# Altium PCB ECG_BLE.PcbDoc (part 3 of 3)
Units mm, origin at the board's own origin, x right, y up, seen from the top; angles counter-clockwise.
Board outline 50.01 x 55.29 mm, 4 copper layers (Top Layer, Internal Plane-GND, Internal Plane-PWR, Bottom Layer), stack 0.99 mm thick; 109 components, 65 nets, 326 pads, 171 vias.
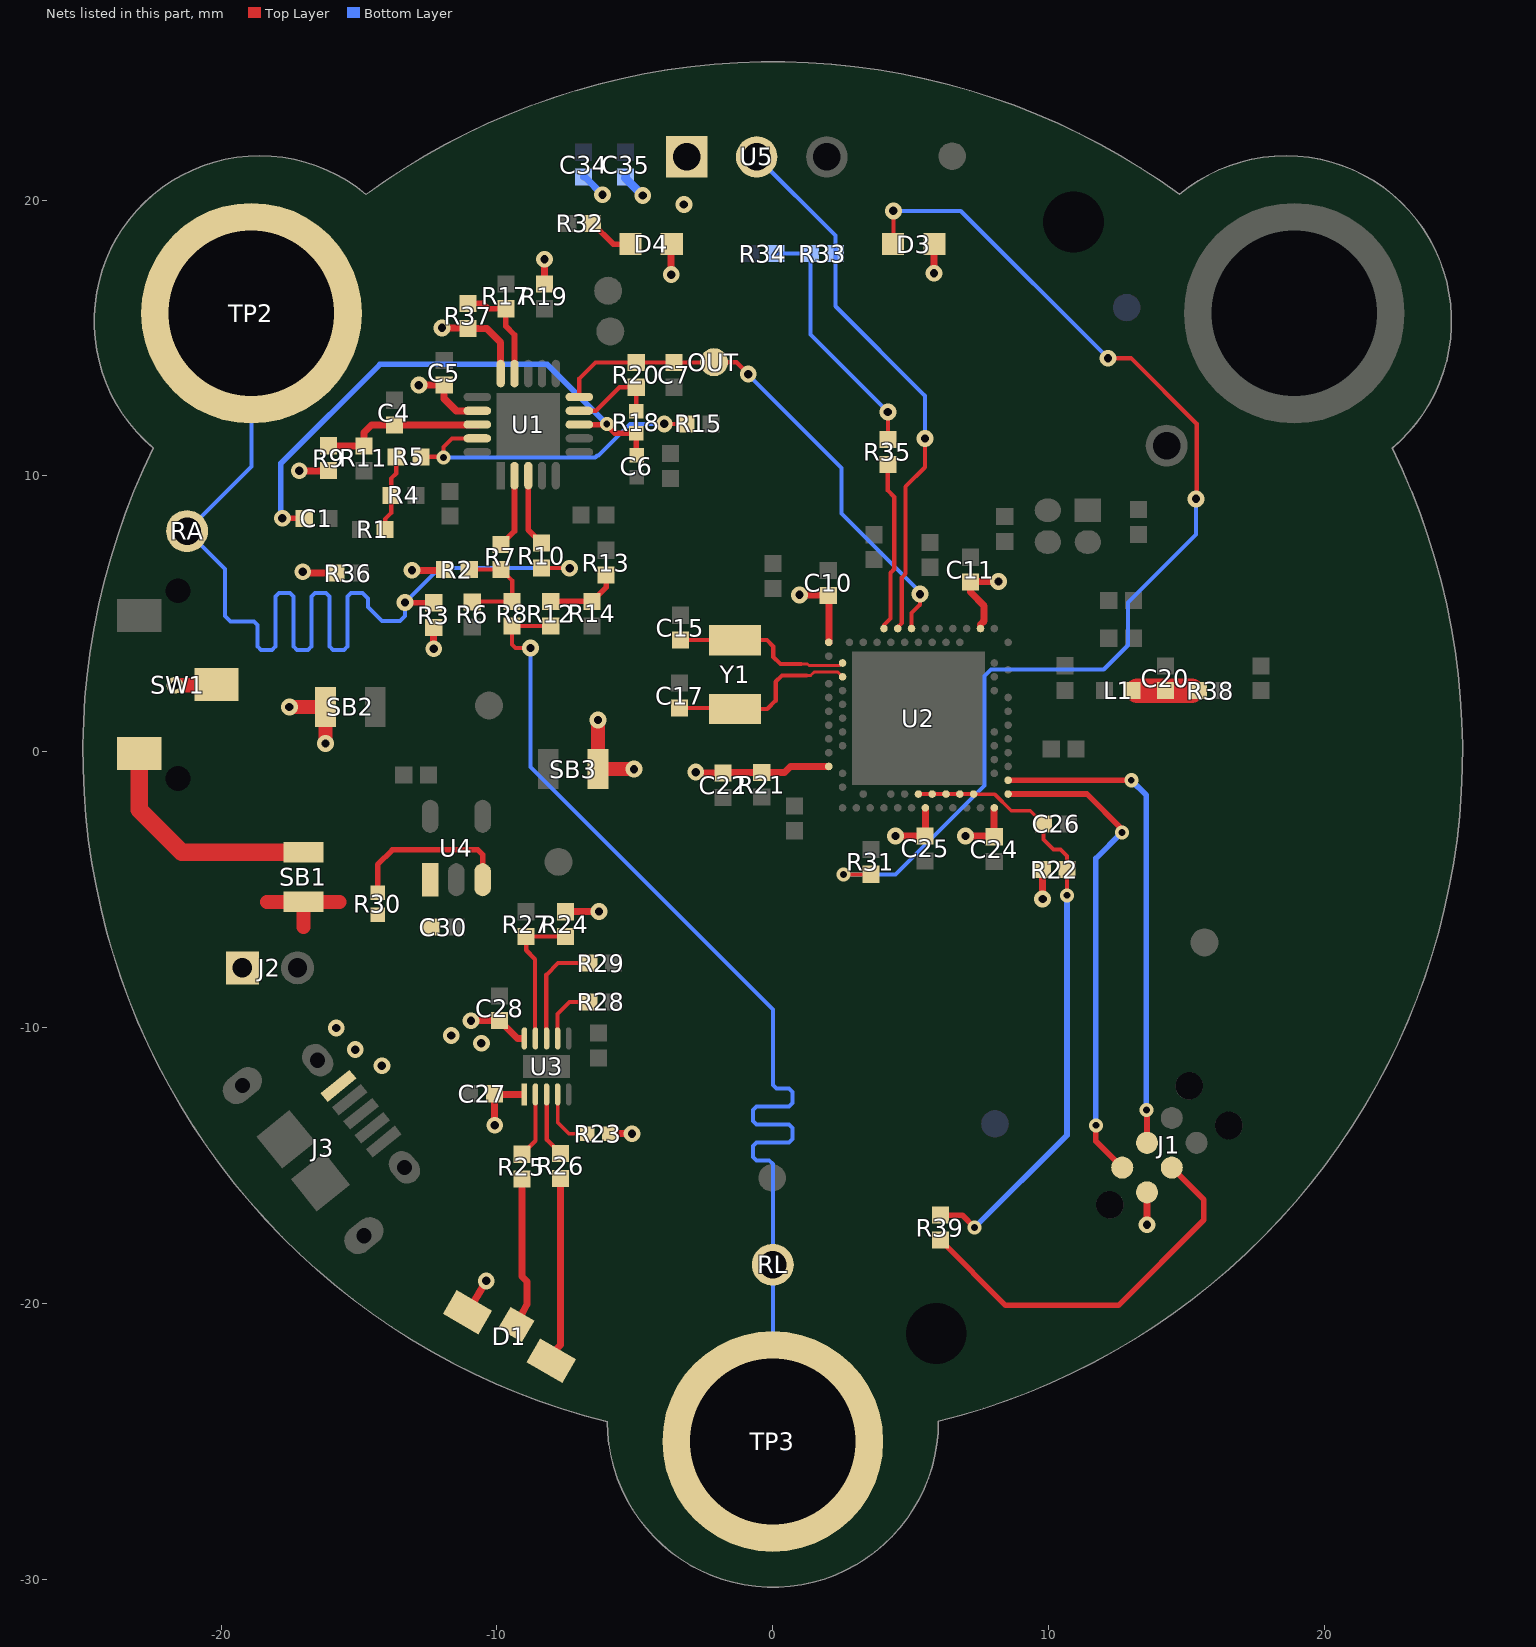
[diagram p4: the nets of this part, all layers, seen from the top]

## Via types
v1: diameter 0.61, hole 0.3, Top Layer to Bottom Layer, tented both sides, 132 vias
v2: diameter 0.5, hole 0.25, Top Layer to Bottom Layer, tented both sides, 20 vias
v3: diameter 0.508, hole 0.25, Top Layer to Bottom Layer, tented both sides, 17 vias
v4: diameter 0.457, hole 0.25, Top Layer to Bottom Layer, tented both sides, 1 vias
v5: diameter 0.61, hole 0.305, Top Layer to Bottom Layer, tented both sides, 1 vias

## Nets (pads, with @x,y where several pads share a name; then routed paths per layer and width w, separated by ;. In a path a pad name is that pad's centre, name@x,y a point inside that pad or via, vN(x,y) a via of type N, cw(c..) or ccw(c..) an arc to the next point about the centre after c; other vN are vias at no path point) (continued)
NetC30_2: C30.2 R30.2 SB1.2 U4.1 | length 3.5
  Top Layer w0.508: -18.328,-5.436 SB1.2@-17.018,-5.436 ; -17.018,-6.35 SB1.2@-17.018,-5.436 ; -15.708,-5.436 SB1.2@-17.018,-5.436
NetD1_2: D1.2 R25.2 | length 5.4
  Top Layer w0.254: D1.2@-9.302,-20.763 -8.915,-20.028 -8.915,-19.202 -9.093,-19.025 R25.2@-9.093,-15.487
NetD1_3: D1.3 R26.2 | length 6.8
  Top Layer w0.254: D1.3@-8.037,-22.071 -8.037,-21.836 -7.696,-21.495 R26.2@-7.696,-15.461
NetD3_2: D3.2 R31.2 | length 41.5
  Top Layer w0.145: D3.2@4.355,18.401 4.369,18.415 v1(4.369,19.609)
  Top Layer w0.152: v3(2.564,-4.446) 3.548,-4.446 R31.2@3.555,-4.439 ; v1(12.151,14.269) 12.986,14.269 15.365,11.889 15.365,9.193 v1(15.342,9.169)
  Bottom Layer w0.152: v3(2.564,-4.446) 4.444,-4.446 7.671,-1.219 7.671,2.743 7.907,2.979 11.996,2.979 12.878,3.861 12.878,5.41 15.342,7.874 v1(15.342,9.169) ; v1(4.369,19.609) 6.811,19.609 v1(12.151,14.269)
NetD4_2: D4.2 R32.1 | length 1.7
  Top Layer w0.203: R32.1@-6.535,19.152 -5.785,18.401 D4.2@-5.165,18.401
NetJ1_3: J1.3 R39.2 | length 14.2
  Top Layer w0.203: R39.2@6.071,-17.697 8.44,-20.066 12.528,-20.066 15.621,-16.973 15.621,-16.231 J1.3@14.462,-15.071
NetR1_1: R1.1 R4.1 R5.1 | length 2.8
  Top Layer w0.152: R1.1@-14.053,8.052 -14.053,8.444 -13.836,8.661 R4.1@-13.836,9.296 -13.836,9.906 -13.651,10.091 R5.1@-13.651,10.693
NetR2_1: R2.1 R6.2 R7.1 R8.2 | length 3.9
  Top Layer w0.152: R2.1@-11.005,6.604 R7.1@-9.862,6.604 ; R6.2@-10.897,5.428 -10.871,5.454 R8.2@-9.449,5.454 -9.449,6.205 R7.1@-9.855,6.611
NetR5_2: R5.2 R15.2 U1.19 | length 11.9
  Top Layer w0.152: R5.2@-12.751,10.693 -11.963,10.693 v3(-11.938,10.668) -11.938,11.049 -11.625,11.362 U1.19@-10.715,11.362 ; v1(-3.937,11.887) R15.2@-3.142,11.887
  Bottom Layer w0.152: v3(-11.938,10.668) -6.44,10.668 -6.363,10.744 -6.325,10.744 -5.182,11.887 v1(-3.937,11.887)
NetR7_2: R7.2 U1.2 | length 2.7
  Top Layer w0.203: R7.2@-9.855,7.511 -9.365,8.002 U1.2@-9.365,9.987
NetR10_2: R10.2 U1.3 | length 2.6
  Top Layer w0.203: U1.3@-8.865,9.987 -8.865,8.045 R10.2@-8.382,7.562
NetR12_2: R12.2 R13.1 R14.2 | length 2.7
  Top Layer w0.203: R12.2@-8.103,5.454 R12.2@-8.052,5.454 R14.2@-6.553,5.454 -6.045,5.962 R13.1@-6.045,6.408
NetR17_1: R17.1 R37.2 U1.14 | length 3.8
  Top Layer w0.203: R37.2@-11.049,16.249 -10.501,16.249 -10.312,16.06 R17.1@-9.677,16.06 -9.677,15.426 -9.365,15.113 U1.14@-9.365,13.812
NetR18_2: R18.2 R20.1 U1.9 | length 3.3
  Top Layer w0.152: U1.9@-7.015,12.362 -6.409,12.362 -5.555,13.215 R20.1@-4.953,13.215 R18.2@-4.953,12.351
NetR23_2: R23.2 U3.4 | length 2.3
  Top Layer w0.127: U3.4@-7.804,-12.42 -7.804,-13.43 -7.391,-13.843 R23.2@-6.725,-13.843
NetR24_2: R24.2 R27.1 U3.9 | length 5.2
  Top Layer w0.152: U3.9@-8.617,-10.39 -8.617,-7.518 -8.941,-7.195 R27.1@-8.941,-6.698 R24.2@-7.518,-6.698
NetR25_1: R25.1 U3.2 | length 2.4
  Top Layer w0.152: R25.1@-9.093,-14.587 -8.604,-14.098 U3.2@-8.604,-12.42
NetR26_1: R26.1 U3.3 | length 2.3
  Top Layer w0.152: U3.3@-8.198,-12.42 -8.198,-14.06 R26.1@-7.696,-14.561
NetR28_2: R28.2 U3.7 | length 2.2
  Top Layer w0.152: U3.7@-7.804,-10.39 -7.804,-9.506 -7.366,-9.068 R28.2@-6.673,-9.068
NetR29_1: R29.1 U3.8 | length 4
  Top Layer w0.152: U3.8@-8.211,-10.39 -8.211,-8.084 -7.785,-7.658 R29.1@-6.673,-7.658
NetR30_1: R30.1 U4.3 | length 6
  Top Layer w0.203: R30.1@-14.326,-5.112 -14.326,-4.089 -13.792,-3.556 -10.693,-3.556 -10.521,-3.729 U4.3@-10.521,-4.637
NetR35_1: R35.1 U2.A8 | length 6.2
  Top Layer w0.152: U2.A8@4.027,4.469 4.027,4.594 4.269,4.837 4.269,6.488 4.402,6.622 4.402,9.237 4.169,9.471 R35.1@4.169,10.421
NetSB1_1: SB1.1 SW1.3 | length 8.6
  Top Layer w0.635: SW1.3@-22.965,-0.062 -22.965,-2.105 -21.434,-3.636 SB1.1@-17.018,-3.636
nRF_RESET: C26.2 R22.1 R39.1 U2.AC13 U2.AC15 U2.AC17 U2.AC19 U2.AC21 | length 22.9
  Top Layer w0.127: U2.AC21@7.277,-1.531 8.033,-1.531 8.636,-2.134 9.334,-2.134 C26.2@9.816,-2.615
  Top Layer w0.152: U2.AC13@5.277,-1.531 U2.AC21@7.277,-1.531 ; C26.2@9.816,-2.615 9.816,-3.183 10.178,-3.545 10.432,-3.545 10.664,-3.777 R22.1@10.664,-4.267 v3(10.664,-5.2)
  Top Layer w0.203: R39.1@6.071,-16.797 6.865,-16.797 v3(7.315,-17.247)
  Bottom Layer w0.203: v3(7.315,-17.247) 10.664,-13.898 v3(10.664,-5.2)
P0.00/XL1: C15.2 U2.D2 Y1.1 | length 6.5
  Top Layer w0.102: 1.03,3.179 1.252,3.179 1.307,3.124 2.432,3.124 U2.D2@2.527,3.219
  Top Layer w0.152: C15.2@-3.353,4.051 -1.373,4.051 Y1.1@-1.372,4.049 -0.214,4.049 0.013,3.823 0.013,3.442 0.275,3.179 1.03,3.179
P0.01/XL2: C17.2 U2.F2 Y1.2 | length 7
  Top Layer w0.102: 1.219,2.769 1.372,2.769 1.499,2.896 2.35,2.896 U2.F2@2.527,2.719
  Top Layer w0.152: C17.2@-3.378,1.587 -1.41,1.587 Y1.2@-1.372,1.549 -0.203,1.549 0.102,1.854 0.102,2.54 0.33,2.769 1.219,2.769
RA: R3.1 R10.1 RA.1 TP2.1 | length 39.2
  Top Layer w0.145: R10.1@-8.382,6.662 -8.375,6.655 v1(-7.366,6.655)
  Top Layer w0.203: v1@-13.328,5.403 -12.82,5.403 ; -12.827,5.41 -12.82,5.403 ; R3.1@-12.294,5.403 -12.82,5.403
  Bottom Layer w0.145: TP2.1@-18.9,15.9 -18.9,10.335 RA.1@-21.234,8.001 -19.863,6.629 -19.863,4.928 -19.66,4.724 -18.811,4.724 -18.68,4.594 -18.68,3.826 -18.549,3.695 -18.158,3.695 -18.027,3.826 -18.027,5.623 -17.896,5.753 -17.505,5.753 -17.374,5.623 -17.374,3.826 -17.243,3.695 -16.852,3.695 -16.721,3.826 -16.721,5.623 -16.59,5.753 -16.199,5.753 -16.068,5.623 -16.068,3.826 -15.937,3.695 -15.546,3.695 -15.415,3.826 -15.415,5.623 -15.284,5.753 -14.872,5.753 -14.681,5.563 -14.681,5.258 -14.173,4.75 -13.513,4.75 -13.335,4.928 v1(-13.335,5.41) -12.09,6.655 v1(-7.366,6.655)
REFIN: C4.2 R9.1 R11.2 U1.18 | length 6.2
  Top Layer w0.152: R9.1@-16.154,11.118 R9.1@-16.104,11.118 ; C4.2@-13.697,11.84 C4.2@-13.617,11.76
  Top Layer w0.254: R9.1@-16.104,11.093 -14.826,11.093 R11.2@-14.821,11.088 -14.821,11.57 -14.547,11.844 C4.2@-13.716,11.844 -13.706,11.854 U1.18@-10.715,11.854
REFOUT: C1.2 C6.1 R18.1 U1.8 | length 20
  Top Layer w0.203: v1(-17.779,8.467) -16.998,8.467 -16.989,8.458 C1.2@-16.985,8.462 ; U1.8@-7.015,11.862 -6.045,11.862 -5.734,11.551 R18.1@-4.953,11.551 -4.953,10.776 C6.1@-4.928,10.75
  Bottom Layer w0.203: v1(-17.779,8.467) -17.831,8.519 -17.831,10.459 -14.244,14.046 -8.179,14.046 v3(-6.02,11.887)
RF: C20.2 L1.2 R38.1 | length 2
  Top Layer w0.889: L1.2@13.211,2.218 C20.2@14.227,2.217 ; R38.1@15.192,2.217 C20.2@14.227,2.217 ; C20.2@14.227,2.217 C20.2@14.227,2.217
RL: R8.1 R12.1 RL.1 TP3.1 | length 40.2
  Top Layer w0.145: v1(-8.788,3.759) -9.322,3.759 -9.449,3.886 R8.1@-9.449,4.554 R12.1@-8.052,4.554
  Bottom Layer w0.145: v1(-8.788,3.759) -8.788,-0.559 0,-9.347 0,-12.069 0.131,-12.2 0.589,-12.2 0.72,-12.33 0.72,-12.722 0.589,-12.853 -0.589,-12.853 -0.72,-12.983 -0.72,-13.375 -0.589,-13.506 0.589,-13.506 0.72,-13.636 0.72,-14.028 0.589,-14.159 -0.589,-14.159 -0.72,-14.289 -0.72,-14.681 -0.589,-14.812 -0.131,-14.812 0,-14.942 RL.1@0,-18.593 TP3.1@0,-25
SIGNAL_OUT: C7.1 OUT.1 R20.2 U1.10 U2.A12 | length 19.5
  Top Layer w0.152: U1.10@-7.015,12.862 -7.015,13.534 -6.433,14.115 R20.2@-4.953,14.115 C7.1@-3.581,14.115 -2.141,14.115 OUT.1@-2.134,14.122 -1.321,14.122 v1(-0.889,13.691) ; 5.027,4.871 5.027,4.469 5.027,5.027 5.334,5.334 v1(5.334,5.715)
  Bottom Layer w0.152: v1@-0.902,13.678 2.492,10.284 2.492,8.636 5.334,5.794 v1(5.334,5.715)
SWDCLK: J1.4 U2.AA24 | length 17.8
  Top Layer w0.203: U2.AA24@8.527,-1.031 v3(12.993,-1.031) ; v3(13.538,-12.979) 13.564,-13.005 J1.4@13.564,-14.173
  Bottom Layer w0.203: v3(12.993,-1.031) 13.538,-1.576 v3(13.538,-12.979)
SWDIO: J1.2 U2.AC24 | length 17.7
  Top Layer w0.203: U2.AC24@8.527,-1.531 11.383,-1.531 12.649,-2.797 v3(12.649,-2.921) ; v3(11.709,-13.538) 11.709,-14.115 J1.2@12.666,-15.071
  Bottom Layer w0.203: v3(11.709,-13.538) 11.709,-3.861 v3(12.649,-2.921)
TEMP_CENTIGRADE_OUT: R33.2 U2.A10 U5.2 | length 20
  Top Layer w0.152: U2.A10@4.527,4.47 4.527,4.52 4.676,4.669 4.676,6.32 4.809,6.453 4.809,9.611 5.512,10.314 v1(5.512,11.354)
  Bottom Layer w0.152: U5.2@-0.584,21.565 2.266,18.714 R33.2@2.266,18.059 2.266,16.149 5.512,12.903 v1(5.512,11.354)
TEMP_FAHRENHEIT_OUT: R33.1 R34.2 R35.2 | length 9.2
  Top Layer w0.145: R35.2@4.169,11.321 v1(4.169,12.319)
  Bottom Layer w0.145: R33.1@1.366,18.059 1.366,15.121 v1(4.169,12.319)
  Bottom Layer w0.152: R34.2@0.107,18.059 R33.1@1.366,18.059
VBAT: C28.1 J2.1 SW1.2 U3.10 | length 3.6
  Top Layer w0.254: v1(-10.94,-9.746) C28.1@-9.906,-9.746 -9.263,-10.39 U3.10@-9.074,-10.39
  Top Layer w0.508: v1(-21.666,2.413) -20.19,2.413 SW1.2@-20.165,2.438
  other v1: -10.566,-10.566 -11.659,-10.287
VBUS_5V: C27.1 D1.1 J3.1 R23.1 R24.1 U3.1 | length 5.5
  Top Layer w0.254: D1.1@-11.068,-20.321 v1(-10.389,-19.177) ; C27.1@-10.091,-12.395 C27.1@-10.084,-12.402 ; v1(-10.084,-13.538) C27.1@-10.084,-12.402 ; U3.1@-9.061,-12.42 -10.067,-12.42 C27.1@-10.084,-12.402 ; R24.1@-7.518,-5.798 -7.511,-5.791 v1(-6.299,-5.791) ; R23.1@-5.925,-13.843 v1(-5.105,-13.843)
  other v1: -14.173,-11.379 -15.138,-10.795 -15.824,-10.008
VCC_3V3: C5.2 C34.2 C35.2 D4.1 R2.2 R3.2 R9.2 R19.1 R36.2 R37.1 SB2.2 U1.15 U1.17 U5.1 | length 17.1
  Top Layer w0.254: v1(-17.17,10.185) -16.111,10.185 R9.2@-16.104,10.193 ; v1(-17.043,6.528) -16.993,6.477 R36.2@-15.842,6.477 ; v1(-13.081,6.579) -11.931,6.579 R2.2@-11.905,6.604 ; v1(-12.832,13.291) C5.2@-11.913,13.291 -11.913,12.798 -11.477,12.362 U1.17@-10.715,12.362 ; v1(-12.294,3.734) R3.2@-12.294,4.503 ; v1(-11.989,15.367) -11.067,15.367 R37.1@-11.049,15.349 -10.37,15.349 -9.865,14.843 U1.15@-9.865,13.712 ; R19.1@-8.28,16.96 v1(-8.28,17.856) ; v1(-3.683,17.297) -3.683,18.383 D4.1@-3.665,18.401
  Top Layer w0.508: v1(-17.526,1.626) SB2.2@-16.216,1.626 v1(-16.216,0.305)
  Bottom Layer w0.254: C34.2@-6.858,20.835 -6.814,20.835 v1(-6.172,20.193)
  Bottom Layer w0.305: C35.2@-5.334,20.937 C35.2@-5.334,20.835 -5.359,20.81 v1(-4.717,20.168)
  other v1: -3.226,19.837
VDD_nRF: C10.2 C11.2 C22.2 C24.2 C25.2 D3.1 J1.1 R21.1 R22.2 SB3.2 U2.A22 U2.AD14 U2.AD23 U2.B1 U2.W1 | length 21.2
  Top Layer w0.25: C22.2@-1.8,-0.762 -1.782,-0.744 R21.1@-0.403,-0.744 0.428,-0.744 0.641,-0.531 U2.W1@2.027,-0.531
  Top Layer w0.254: v1(-2.794,-0.737) -2.769,-0.762 C22.2@-1.8,-0.762 ; v1(0.965,5.69) 1.988,5.69 C10.2@2.007,5.671 2.027,5.651 U2.B1@2.027,3.969 ; v1(4.445,-3.048) C25.2@5.51,-3.048 ; C25.2@5.516,-3.054 5.527,-3.043 U2.AD14@5.527,-2.031 ; v1(5.842,17.348) 5.842,18.388 D3.1@5.855,18.401 ; v1(6.985,-3.048) 7.994,-3.048 C24.2@8.025,-3.079 8.025,-2.065 U2.AD23@8.009,-2.048 ; U2.A22@7.527,4.469 7.527,4.616 7.662,4.751 7.654,4.758 7.662,4.766 7.662,5.292 7.163,5.791 C11.2@7.163,6.154 7.181,6.172 v1(8.179,6.172) ; R22.2@9.764,-4.267 9.779,-4.282 v1(9.779,-5.334) ; v1(13.564,-17.145) J1.1@13.564,-15.969
  Top Layer w0.508: v1(-6.34,1.151) SB3.2@-6.34,-0.627 v1(-5.03,-0.627)
pads on no net: FID1.0 FID2.0 FID3.0 FID4.0 J1.0 J1.6 J3.2 J3.3 J3.4 MH1.1 MH2.1 SW1.0 SW1.1 U2.A14 U2.A16 U2.AB2 U2.AC5 U2.AC9 U2.AC11 U2.AD4 U2.AD6 U2.AD10 U2.AD12 U2.AD16 U2.AD18 U2.AD20 U2.AD22 U2.B3 U2.B9 U2.B11 U2.B13 U2.B15 U2.B17 U2.G1 U2.H2 U2.J1 U2.J24 U2.K2 U2.L24 U2.M2 U2.N1 U2.P2 U2.P23 U2.R1 U2.R24 U2.T2 U2.T23 U2.U1 U2.U24 U2.V23 U2.W24 U2.Y23 U4.4

## Polygon pours and split planes (outlines as drawn)
VCC_3V3 on Bottom Layer "BOTTOM_LAYER_VCC_3V3" (solid, remove dead copper, pour order 59): -4.451,14.281 -4.506,14.281 -5.325,13.478 -12.169,13.478 -14.423,13.478 -14.777,13.832 -14.777,15.744 -9.362,21.159 -7.459,21.167 -7.442,21.184 -4.775,21.184 -4.42,21.539 -4.42,22.682 -4.191,22.911 -1.88,22.911 -1.676,22.708 -1.676,19.624 -1.676,17.056
GND on Bottom Layer "BOTTOM_LAYER-GND" (solid, remove dead copper, pour order 60): -5.998,-24.283 cw(c0.002,0) -22.457,11.011 -22.459,11.011 cw(c-18.603,15.607) -14.746,20.203 -14.745,20.205 cw(c0,0) 14.743,20.206 cw(c18.596,15.607) 22.45,11.008 cw(c0,0) 6,-24.273 6.002,-24.273 cw(c0.002,-24.278)
VBAT on Top Layer "TOP_LAYER-VBAT" (solid, remove dead copper, pour order 56): -9.083,-9.411 -9.083,-10.76 -9.322,-10.998 -11.735,-10.998 -12.014,-10.719 -12.014,-9.474 -11.938,-9.398 -9.096,-9.398
VBUS_5V on Top Layer "TOP_LAYER-VBUS_5V" (solid, remove dead copper, pour order 55): -13.411,-11.201 -11.633,-12.979 -10.617,-12.979 -10.439,-12.802 -10.439,-11.989 -10.389,-11.938 -8.966,-11.938 -8.865,-12.04 -8.865,-13.411 -9.677,-14.224 -12.522,-14.224 -14.94,-11.806 -15.4,-11.825 -16.467,-12.706 -16.613,-12.699 -18.161,-11.151 -18.161,-10.287 -16.739,-8.865 -15.469,-8.865 -13.411,-10.922
NetC30_2 on Top Layer "TOP_LAYER-NetC30_2" (solid, remove dead copper, pour order 57): -12.04,-6.758 -12.394,-7.112 -16.129,-7.112 -16.383,-6.858 -18.796,-6.858 -19.05,-6.604 -19.05,-5.334 -18.658,-4.942 -15.632,-4.942 -14.986,-5.588 -13.564,-5.588 -13.386,-5.41 -13.386,-4.064 -13.284,-3.962 -12.141,-3.962 -12.116,-3.988 -12.116,-5.869 -12.04,-5.945
GND on Top Layer "TOP_LAYER-GND" (solid, remove dead copper, pour order 58): -5.998,-24.257 cw(c0.002,0.025) -22.457,11.036 -22.459,11.036 cw(c-18.603,15.632) -14.746,20.229 -14.745,20.231 cw(c0,0.025) 14.743,20.231 cw(c18.596,15.632) 22.45,11.033 cw(c0,0.025) 6,-24.247 6.002,-24.247 cw(c0.002,-24.252)
+3V3 on Top Layer "TOP_LAYER-+3V3" (solid, remove dead copper, pour order 61): -11.735,-3.023 -11.506,-2.794 -11.506,-2.032 -10.82,-1.346 -10.82,0.356 -10.922,0.457 -12.649,0.457 -12.776,0.33 -12.776,-2.413 -12.802,-2.413 -12.802,-2.946 -12.725,-3.023
GND on Internal Plane-GND (split plane): 401 vertices, not listed, extent -24.502,-29.773 24.091,24.505
VBUS_5V on Internal Plane-PWR (split plane): -2.542,-6.71 -2.542,-20.442 -5.885,-23.785 -6.118,-23.728 -6.781,-23.547 -7.439,-23.348 -8.091,-23.13 -8.737,-22.894 -9.375,-22.64 -10.007,-22.368 -10.63,-22.078 -11.245,-21.771 -11.851,-21.447 -12.448,-21.106 -13.035,-20.749 -13.612,-20.375 -14.178,-19.985 -14.733,-19.58 -15.276,-19.159 -15.807,-18.723 -16.326,-18.272 -16.832,-17.807 -17.325,-17.328 -17.804,-16.835 -18.269,-16.329 -18.72,-15.81 -19.156,-15.279 -19.577,-14.735 -19.983,-14.18 -20.373,-13.614 -20.746,-13.037 -21.104,-12.45 -21.445,-11.853 -21.769,-11.247 -22.076,-10.632 -22.365,-10.009 -22.627,-9.4 -14.711,-9.4 -11.662,-12.449 -11.609,-12.49 -11.547,-12.516 -11.481,-12.524 -9.83,-12.524 -9.763,-12.516 -9.702,-12.49 -9.649,-12.449 -8.455,-11.256 -8.414,-11.202 -8.389,-11.141 -8.38,-11.074 -8.38,-6.858 -8.389,-6.792 -8.401,-6.761 -8.414,-6.73 -8.455,-6.677 -9.294,-5.837 -9.294,-4.828 -4.424,-4.828
+3V3 on Internal Plane-PWR (split plane): -13.237,2.714 -13.184,2.674 -13.153,2.661 -13.122,2.648 -13.056,2.639 -7.495,2.639 -7.495,-4.316 -15.032,-4.316 -15.238,-4.11 -15.238,3.554 -14.076,3.554
VDD_nRF on Internal Plane-PWR (split plane): 247 vertices, not listed, extent -6.983,-29.773 24.091,24.505
VCC_3V3 on Internal Plane-PWR (split plane): 158 vertices, not listed, extent -24.21,-0.506 -2.134,24.411
VBAT on Internal Plane-PWR (split plane): -19.433,2.84 -19.433,-0.127 -19.424,-0.193 -19.399,-0.255 -19.358,-0.308 -18.723,-0.943 -18.67,-0.984 -18.626,-1.002 -18.608,-1.009 -18.542,-1.018 -15.75,-1.018 -15.75,-4.216 -15.741,-4.283 -15.716,-4.344 -15.675,-4.398 -15.32,-4.753 -15.266,-4.794 -15.248,-4.801 -15.205,-4.819 -15.138,-4.828 -9.807,-4.828 -9.807,-5.944 -9.798,-6.01 -9.772,-6.072 -9.732,-6.125 -8.892,-6.964 -8.892,-10.968 -9.936,-12.012 -11.375,-12.012 -14.424,-8.963 -14.477,-8.922 -14.539,-8.897 -14.605,-8.888 -22.832,-8.888 -22.891,-8.739 -23.127,-8.093 -23.345,-7.442 -23.545,-6.784 -23.726,-6.121 -23.888,-5.453 -24.032,-4.781 -24.156,-4.105 -24.262,-3.426 -24.348,-2.744 -24.416,-2.06 -24.464,-1.374 -24.493,-0.687 -24.502,0 -24.493,0.687 -24.464,1.374 -24.416,2.06 -24.348,2.744 -24.284,3.249 -19.842,3.249

## Keep-outs
Keep-Out Layer:
  lines w0.508: -22.459,11.011 cw(c-18.602,15.606) -14.746,20.203 ; -22.457,11.011 ccw(c0.002,0) -5.998,-24.283 ccw(c0.002,-24.281) 6.002,-24.273 ; -14.745,20.205 cw(c0,0) 14.743,20.206 cw(c18.599,15.609) 22.45,11.008 cw(c0,0) 6,-24.273

## Other copper
Top Layer:
  pour cut-out: -15.24,-13.945 -14.453,-13.157 -13.894,-13.716 -14.681,-14.503
  pour cut-out: -16.855,-12.298 -14.755,-14.399 -15.253,-14.897 -17.221,-12.929 -17.221,-12.45
  pour cut-out: -8.001,14.257 -8.001,18.694 -4.115,18.694 -4.115,14.281
  pour cut-out: 8.357,3.969 8.357,-1.295 2.591,-1.295 2.591,3.969
  pour cut-out: -10.602,13.248 -7.62,13.248 -7.62,10.668 -10.602,10.668
  pour cut-out: -11.938,4.679 -11.938,3.581 -11.43,3.581 -11.43,4.679
  pour cut-out: 4.242,8.383 5.359,8.383 5.359,6.857 4.242,6.857
  pour cut-out: -1.905,0.203 -4.216,0.203 -4.216,1.345 -1.905,1.345
  pour cut-out: 1.49,-3.581 3.37,-3.581 3.37,-3.2 3.37,-1.665 1.49,-1.665
  pour cut-out: 5.886,-2.094 7.667,-2.094 7.667,-2.54 5.886,-2.54
  pour cut-out: 2.527,-1.168 4.846,-1.168 4.846,-2.235 2.527,-2.235
  pour cut-out: 7.564,-1.092 4.922,-1.092 4.846,-1.168 4.846,-1.381 4.912,-1.447 9.02,-1.447 9.02,-1.092 9.02,3.048 7.564,3.048
  pour cut-out: 11.1,2.794 18.217,2.794 18.217,10.693 26.035,10.693 26.035,-16.307 18.217,-16.307 18.214,1.547 11.1,1.552
  pour cut-out: 2.289,-0.279 1.607,-0.279 1.607,0.229 -0.254,0.229 -0.254,2.469 1.626,2.469 2.834,2.469 2.834,0.033 2.834,-0.446 2.289,-0.446
  pour cut-out: 3.777,3.429 7.852,3.429 7.852,4.027 3.777,4.039
  pour cut-out: 2.705,4.48 2.705,6.382 3.102,6.382 3.102,4.791 3.088,4.776 3.088,4.48
  pour cut-out: -13.355,8.083 -11.379,8.083 -11.379,7.417 -13.36,7.417
  pour cut-out: 11.111,3.61 12.978,3.61 12.98,3.077 11.111,3.04
  pour cut-out: -13.985,-9.322 -12.289,-9.322 -12.289,-10.49 -12.28,-10.5 -12.28,-10.604 -12.46,-10.784 -13.255,-10.784 -13.985,-10.054
  pour cut-out: 5.486,-18.281 5.959,-18.281 6.536,-18.858 6.348,-19.045 5.513,-19.045 5.513,-18.308
  pour cut-out: 7.894,-21.688 8.738,-20.844 8.738,-20.498 8.458,-20.218 7.925,-20.218 7.569,-20.574 7.569,-21.363
  pour cut-out: -16.154,-2.921 -14.173,-2.921 -14.173,-3.734 -16.154,-3.734
  pour cut-out: -10.157,-3.054 -8.28,-3.052 -8.28,-3.453 -10.157,-3.455
  pour cut-out: -14.199,-0.356 -13.233,-0.356 -13.233,0.356 -14.199,0.356
  pour cut-out: -13.056,4.242 -5.715,4.242 -5.715,0.762 -13.056,0.762
  text "'.Layer_Name'" at 386.779,-71.929 h2.54
Bottom Layer:
  pour cut-out: 7.108,3.708 7.158,3.658 7.158,3.424 7.112,3.378 3.454,3.378 3.454,3.708
  pour cut-out: 7.417,3.534 7.417,-0.889 7.947,-0.889 7.947,3.534
  pour cut-out: 4.695,12.537 5.046,12.537 5.046,12.101 4.695,12.101
  pour cut-out: 13.906,11.011 15.977,11.011 15.977,7.239 13.906,7.239
  pour cut-out: 18.217,10.693 26.086,10.693 26.086,-16.307 18.217,-16.307
  text "'.Layer_Name'" at 385.563,-71.929 h2.54
Internal Plane-GND (plane layer: these items are gaps in the copper):
  pour cut-out: 11.1,4.496 18.217,4.496 18.217,10.693 26.035,10.693 26.035,-16.307 18.217,-16.307 18.214,0.497 11.1,0.503
  text "'.Layer_Name'" at 395.681,-71.958 h1.52
Internal Plane-PWR (plane layer: these items are gaps in the copper):
  pour cut-out: 11.1,4.496 18.217,4.496 18.217,10.693 26.086,10.693 26.086,-16.307 18.217,-16.307 18.214,0.497 11.1,0.503
  lines w0.508: -24.841,3.505 -19.736,3.505 -19.177,2.946 -19.177,-0.127 -18.542,-0.762 -15.623,-0.762 ; -23.597,-8.636 -23.089,-9.144 -14.605,-9.144 -11.481,-12.268 -9.83,-12.268 -8.636,-11.074 -8.636,-6.858 -9.55,-5.944 -9.55,-4.572 ; -7.239,-4.572 -7.239,2.896 ; -6.198,-24.46 -2.286,-20.549 -2.286,-6.604 -4.318,-4.572 -9.906,-4.572 -15.138,-4.572 -15.494,-4.216 -15.494,3.81 -13.97,3.81 -13.056,2.896 -5.969,2.896 -4.648,4.216 -4.648,8.026 -1.877,10.797 -1.877,24.788 -2.134,25.044
  text "'.Layer_Name'" at 401.65,-72.111 h1.52

## Silkscreen, mask and mechanical layers (free items; w line width, h text height)
Top Overlay:
  drawing of 475 lines, arcs and shapes, not listed
  text "PWR" at -3.454,16.612 h0.76
  text "ADV" at 4.902,16.154 h0.76
  text "A" at -10.998,7.696 h1.02
  text "ON" at -23.47,-3.124 h0.64
  text "E2S-ABH-010V1" at 22.098,-3.81 h1.02 r90
  text "A" at 11.379,-9.804 h1.02
  text "'.Layer_Name'" at 385.563,-72.183 h2.54
Bottom Overlay:
  text "LA" at 18.136,8.534 h1.02
  text "-" at -14.757,-8.128 h1.02
  text "+" at -22.25,-8.28 h1.02
  text "'.Layer_Name'" at 385.817,-72.691 h2.54
Top Paste:
  text "'.Layer_Name'" at 385.817,-71.675 h2.54
Bottom Paste:
  text "'.Layer_Name'" at 402.412,-73.025 h1.52
Top Solder:
  text "'.Layer_Name'" at 385.944,-71.929 h2.54
Bottom Solder:
  text "'.Layer_Name'" at 385.817,-71.421 h2.54
Drill Guide:
  text "'.Layer_Name'" at 385.944,-71.675 h2.54
Fabrication Notes:
  drawing of 295 lines, arcs and shapes, not listed
  text "FABRICATION NOTES:" at 260.584,204.114 h2.03
  text "1. LATEST VERSION OF ALL REFERENCED IPC SPECIFICATIONS TO BE USED." at 260.584,199.034 h1.78
  text "2. ALL MULTILAYER PC BOARDS MUST BE PRODUCED IN ACCORDANCE IPC-A-600, CLASS 2." at 260.584,193.956 h1.78
  text "3. INSPECT ALL MULTILAYER PC BOARDS IN ACCORDANCE WITH IPC-6012, CLASS 2." at 260.584,188.876 h1.78
  text "4. MATERIAL:  THIN LAMINATE, FR4 COPPER CLAD" at 260.584,183.796 h1.78
  text "1 OZ PER LAYER (EXTERNAL LAYERS), 1MM +/-10% THICK," at 265.613,180.365 h1.78
  text "MINIMUM CTI (PER IEC 60112 USING SOLUTION A) = 140." at 265.613,176.555 h1.78
  text "5. FABRICATE BOARDS USING THE GERBER FILES CONTAINED IN FABRICATION FOLDER." at 260.584,171.096 h1.78
  text "6. DRILL DATA ARE CONTAINED IN THE FABRICATION FOLDER." at 260.584,165.762 h1.78
  text "7. ALL HOLE DIAMETERS MUST BE PER DRILL CHART +/-0.003 INCHES TOLERANCE," at 260.584,160.555 h1.78
  text "UNLESS OTHERWISE SPECIFIED." at 265.664,156.82 h1.78
  text "8. PLATED-THRU HOLES TO HAVE COPPER WALL THICKNESS NOT LESS THAN 0.001 INCHES." at 260.584,151.665 h1.78
  text "THICKNESS TO BE DETERMINED BY IPC-6012, CLASS 2." at 265.156,147.98 h1.78
  text "9. ELECTROLESS NICKEL IMMERSION GOLD (ENIG) 2-8 uINCHES GOLD OVER 150-250 uINCHES NICKEL." at 260.584,142.775 h1.78
  text "10. SILKSCREEN BOTH SIDES WITH WHITE EPOXY NON-CONDUCTIVE INK." at 260.584,138.328 h1.78
  text "SILKSCREEN MAY BE TRIMMED OFF ANY SOLDERED ENTITY." at 267.086,134.518 h1.78
  text "11. SOLDER MASK (GREEN COLOUR) BOTH SIDES WITH LIQUID PHOTO IMAGEABLE SOLDER MASK (LPI)," at 260.584,129.438 h1.78
  text "MEETING IPC-SM-840, CLASS 2, HIGH PERFORMANCE SPECIFICATIONS." at 266.934,125.933 h1.78
  text "FINISH: SOLDER MASK OVER BARE COPPER (SMOBC)." at 267.218,122.657 h1.78
  text "12. WARP AND TWIST SHALL BE LESS THAN 0.0075 INCH PER INCH." at 260.584,116.484 h1.78
  text "INSPECT PER IPC-TM-650, 2.4.22." at 267.086,112.878 h1.78
  text "13. ALL BOARDS MUST BE DATE CODED USING A FOUR DIGIT CODE," at 260.584,107.975 h1.78
  text "YEAR FOLLOWED BY WEEK (e.g. 0449 = 49TH WEEK OF 2004)." at 267.086,104.369 h1.78
  text "14. ALL DIMENSIONS AND HOLE DIAMETERS APPLY TO THE FINISHED BOARD." at 260.584,98.958 h1.78
  text "15. PADS MUST BE FINISHED TO WITHIN +/-0.0015 INCHES OF THE MINOR DIMENSION (PAD WIDTH)" at 260.584,94.005 h1.78
  text "AND +/-0.002 INCHES OF THE MAJOR DIMENSION (PAD LENGTH)." at 267.163,90.145 h1.78
  text "Layer" at 96.863,85.534 h1.52
  text "Name" at 107.275,85.534 h1.52
  text "Material" at 136.73,85.534 h1.52
  text "Thickness" at 158.568,85.534 h1.52
  text "Constant" at 175.074,85.534 h1.52
  text "Board Layer Stack" at 189.549,85.534 h1.52
  text "16. FIDUCIALS MUST BE FREE OF ANY MARKINGS." at 260.584,85.496 h1.78
  text "1" at 96.863,82.486 h1.52
  text "Top Overlay" at 107.275,82.486 h1.52
  text "17. BARE BOARD TO BE ELECTRICALLY TESTED IN ACCORDANCE WITH IPC-ET-652 AND MARKED AS TESTED." at 260.584,80.289 h1.78
  text "2" at 96.863,79.438 h1.52
  text "Top Solder" at 107.275,79.438 h1.52
  text "Solder Resist" at 136.73,79.438 h1.52
  text "0.010mm" at 158.568,79.438 h1.52
  text "3.5" at 175.074,79.438 h1.52
  text "3" at 96.863,76.391 h1.52
  text "Top Layer" at 107.275,76.391 h1.52
  text "Copper" at 136.73,76.391 h1.52
  text "0.035mm" at 158.568,76.391 h1.52
  text "18. BOARDS SHALL BE UL-RECOGNIZED AND UL-MARKED. UL FIRE RETARDANT RATING 94V-0 OR HIGHER." at 260.584,75.209 h1.78
  text "4" at 96.863,73.343 h1.52
  text "Dielectric1" at 107.275,73.343 h1.52
  text "FR-4" at 136.73,73.343 h1.52
  text "0.125mm" at 158.568,73.343 h1.52
  text "4.2" at 175.074,73.343 h1.52
  text "5" at 96.863,70.294 h1.52
  text "Internal Plane-GND" at 107.275,70.294 h1.52
  text "Copper" at 136.73,70.294 h1.52
  text "0.035mm" at 158.568,70.294 h1.52
  text "19. ROHS: ALL MATERIALS MUST BE COMPLIANT WITH THE ROHS DIRECTIVE." at 260.584,70.129 h1.78
  text "6" at 96.863,67.246 h1.52
  text "Dielectric 2" at 107.275,67.246 h1.52
  text "0.600mm" at 158.568,67.246 h1.52
  text "4.2" at 175.074,67.246 h1.52
  text "7" at 96.863,64.198 h1.52
  text "Internal Plane-PWR" at 107.275,64.198 h1.52
  text "Copper" at 136.73,64.198 h1.52
  text "0.035mm" at 158.568,64.198 h1.52
  text "8" at 96.863,61.151 h1.52
  text "Dielectric 3" at 107.275,61.151 h1.52
  text "0.125mm" at 158.568,61.151 h1.52
  text "4.2" at 175.074,61.151 h1.52
  text "9" at 96.863,58.102 h1.52
  text "Bottom Layer" at 107.275,58.102 h1.52
  text "Copper" at 136.73,58.102 h1.52
  text "0.035mm" at 158.568,58.102 h1.52
  text "10" at 96.863,55.054 h1.52
  text "Bottom Solder" at 107.275,55.054 h1.52
  text "Solder Resist" at 136.73,55.054 h1.52
  text "0.010mm" at 158.568,55.054 h1.52
  text "3.5" at 175.074,55.054 h1.52
  text "11" at 96.863,52.006 h1.52
  text "Bottom Overlay" at 107.275,52.006 h1.52
  text "Total Board Thickness = 1.01 MM" at 115.57,41.3 h2.54
BOARD-OUTLINE:
  lines w0.203: -22.459,11.011 cw(c-18.602,15.606) -14.746,20.203 ; -22.457,11.011 ccw(c0.002,0) -5.998,-24.283 ccw(c0.002,-24.281) 6.002,-24.273 ; -14.745,20.205 cw(c0,0) 14.743,20.206 cw(c18.599,15.609) 22.45,11.008 cw(c0,0) 6,-24.273
Mechanical 5:
  lines w0.203: -22.459,11.011 cw(c-18.602,15.606) -14.746,20.203 ; -22.457,11.011 ccw(c0.002,0) -5.998,-24.283 ccw(c0.002,-24.281) 6.002,-24.273 ; -14.745,20.205 cw(c0,0) 14.743,20.206 cw(c18.599,15.609) 22.45,11.008 cw(c0,0) 6,-24.273
Dimensions:
  lines w0.203: -22.459,11.011 cw(c-18.602,15.606) -14.746,20.203 ; -22.457,11.011 ccw(c0.002,0) -5.998,-24.283 ccw(c0.002,-24.281) 6.002,-24.273 ; -14.745,20.205 cw(c0,0) 14.743,20.206 cw(c18.599,15.609) 22.45,11.008 cw(c0,0) 6,-24.273
  text "'.Layer_Name'" at 415.62,-73.685 h1.52
Template:
  lines w0.127: -113.614,9.449 -105.994,9.449 ; -113.614,109.144 -105.994,109.144 ; -113.614,208.839 -105.994,208.839 ; -42.748,-90.246 -42.748,-82.626 ; -42.748,300.914 -42.748,308.534 ; 27.864,-90.246 27.864,-82.626 ; 27.864,300.914 27.864,308.534 ; 98.73,-90.246 98.73,-82.626 ; 98.73,300.914 98.73,308.534 ; 169.596,-90.246 169.596,-82.626 ; 169.596,300.914 169.596,308.534 ; 240.335,-90.246 240.335,-82.626 ; 240.335,300.914 240.335,308.534 ; 311.201,-90.246 311.201,-82.626 ; 311.201,300.914 311.201,308.534 ; 330.886,-82.626 445.186,-82.626 ; 381.94,-90.246 381.94,-82.626 ; 381.94,300.914 381.94,308.534 ; 445.186,-52.146 445.186,-82.626 ; 445.186,9.449 452.806,9.449 ; 445.186,109.144 452.806,109.144 ; 445.186,208.839 452.806,208.839 ; 445.186,-82.626 445.186,300.914 -105.994,300.914 -105.994,-82.626 445.186,-82.626 ; -113.614,-90.246 452.806,-90.246 452.806,308.534 -113.614,308.534 -113.614,-90.246
  lines w0.254: 259.766,-35.128 445.059,-35.128 ; 292.786,-75.006 353.746,-75.006 445.186,-75.006 ; 292.786,-67.386 353.746,-67.386 445.052,-67.386 ; 292.786,-59.893 353.365,-59.893 ; 292.786,-52.273 353.365,-52.273 ; 318.186,-82.626 318.186,-75.006 ; 328.346,-67.386 328.346,-44.526 ; 353.746,-82.626 353.746,-44.526 ; 353.746,-59.766 445.186,-59.766 ; 376.606,-82.626 376.606,-75.006 ; 386.766,-82.626 386.766,-75.006 ; 435.026,-82.626 435.026,-75.006 ; 259.766,-44.526 259.766,-24.723 445.186,-24.723 445.186,-44.526 ; 259.766,-44.526 259.766,-82.626 292.786,-82.626 ; 259.766,-44.526 292.786,-44.526 ; 292.786,-82.626 445.186,-82.626 445.186,-44.526 ; 292.786,-82.626 292.786,-44.526 ; 292.786,-44.526 445.186,-44.526
  text "1" at -78.655,303.835 h1.78
  text "2" at -8.026,303.835 h1.78
  text "3" at 62.569,303.835 h1.78
  text "4" at 133.604,303.835 h1.78
  text "5" at 204.301,303.835 h1.78
  text "6" at 275.184,303.835 h1.78
  text "7" at 346.304,303.835 h1.78
  text "8" at 416.916,303.835 h1.78
  text "A" at -110.439,256.642 h1.78
  text "A" at 448.361,256.642 h1.78
  text "B" at -110.439,156.82 h1.78
  text "B" at 448.361,156.82 h1.78
  text "C" at -110.439,57.252 h1.78
  text "C" at 448.361,57.252 h1.78
  text "THE INFORMATION CONTAINED IN THIS DOCUMENT IS PROPRIETARY OF CUSTOMER." at 260.915,-28.898 h1.91
  text "ANY PRODUCTION IN PART OR WHOLE WITHOUT PRIOR WRITTEN AUTHORIZATION OF CUSTOMER IS PROHIBITED." at 261.122,-32.797 h1.91
  text "D" at -110.439,-42.57 h1.78
  text "D" at 448.361,-42.57 h1.78
  text "Drawn By" at 295.326,-47.066 h1.14
  text "DATE" at 330.886,-47.066 h1.14
  text "CUSTOMER: Abhaya Global Information Technology Inc." at 289.179,-48.895 h2.54
  text "UNLESS OTHERWISE" at 262.306,-49.606 h1.78
  text "Design Partner:" at 356.032,-49.726 h2.54
  text "Sandeep" at 303.327,-50.749 h1.52
  text "'.Print_Date'" at 330.886,-50.876 h1.78
  text "SPECIFIED:" at 268.656,-52.146 h1.78
  text "Designed By" at 294.869,-54.686 h1.14
  text "DATE" at 330.886,-54.686 h1.14
  text "ALL DIMENSIONS ARE" at 261.036,-55.956 h1.78
  text "Embdes Engineering Solutions Pvt.Ltd." at 354.736,-57.404 h2.54
  text "Aravinth D" at 303.327,-58.141 h1.52
  text "'.Print_Date'" at 330.886,-58.496 h1.78
  text "IN INCHES" at 268.097,-58.953 h1.78
  text "Checked By" at 294.869,-62.306 h1.14
  text "DATE" at 330.886,-62.306 h1.14
  text "TOLERANCES" at 266.827,-62.763 h1.78
  text "ROJECT NAME:  E2S-ABH-010V1" at 356.032,-64.775 h2.03
  text "(DECIMAL):" at 268.097,-65.303 h1.78
  text "Vijay Anand" at 303.2,-66.091 h1.52
  text "'.Print_Date'" at 330.886,-66.116 h1.78
  text ".X +/-0.1" at 268.097,-69.113 h1.78
  text "REF ID" at 295.326,-69.926 h1.14
  text ".XX +/-0.01" at 266.827,-71.653 h1.78
  text "LAYER NAME:" at 356.032,-72.141 h2.03
  text ".XXX +/-0.005" at 264.287,-74.193 h1.78
  text "Scale" at 295.326,-77.546 h1.14
  text "Sheet     of" at 356.286,-77.546 h1.14
  text "Size" at 379.146,-77.546 h1.14
  text "DWG NO" at 389.306,-77.546 h1.14
  text "REV" at 437.566,-77.546 h1.14
  text "ANGLES +/-0.5" at 264.287,-78.003 h1.78
  text "DO NOT SCALE" at 324.536,-78.816 h1.78
  text "1:1" at 302.946,-80.086 h1.78
  text "10" at 368.427,-80.315 h1.78
  text "A2" at 380.416,-80.721 h2.29
  text "1.0" at 437.693,-80.721 h1.78
  text "DRAWING" at 328.346,-81.356 h1.78
  text "1" at -78.655,-87.071 h1.78
  text "2" at -8.026,-87.071 h1.78
  text "3" at 62.569,-87.071 h1.78
  text "4" at 133.604,-87.071 h1.78
  text "5" at 204.301,-87.071 h1.78
  text "6" at 275.184,-87.071 h1.78
  text "7" at 346.304,-87.071 h1.78
  text "8" at 416.916,-87.071 h1.78
Drill Drawing:
  circle w0.254: c-85.277,141.891 r0.847
  lines w0.254: -86.124,125.805 -85.277,126.228 -84.431,125.805 -84.854,126.651 -84.431,127.498 -85.277,127.075 -86.124,127.498 -85.701,126.651 -86.124,125.805 ; -86.124,129.615 -84.431,129.615 -84.431,131.308 -86.124,131.308 -86.124,129.615 ; -86.124,133.848 -85.701,133.848 -85.277,133.425 -84.854,133.848 -84.431,133.848 -84.854,134.271 -84.431,134.695 -84.854,134.695 -85.277,135.118 -85.701,134.695 -86.124,134.695 -85.701,134.271 -86.124,133.848 ; -86.124,137.235 -85.277,137.658 -84.431,137.235 -84.854,138.081 -84.431,138.928 -85.277,138.505 -86.124,138.928 -85.701,138.081 -86.124,137.235 ; -86.124,145.278 -85.701,145.278 -85.701,144.855 -84.854,144.855 -84.854,145.278 -84.431,145.278 -84.431,146.125 -84.854,146.125 -84.854,146.548 -85.701,146.548 -85.701,146.125 -86.124,146.125 -86.124,145.278 ; -86.124,148.665 -86.124,149.088 -85.701,149.511 -86.124,149.935 -86.124,150.358 -85.701,150.358 -85.277,149.935 -84.854,150.358 -84.431,150.358 -84.431,149.935 -84.854,149.511 -84.431,149.088 -84.431,148.665 -84.854,148.665 -85.277,149.088 -85.701,148.665 -86.124,148.665 ; -86.124,152.898 -85.701,152.898 -85.701,152.475 -84.854,152.475 -84.854,152.898 -84.431,152.898 -84.431,153.745 -84.854,153.745 -84.854,154.168 -85.701,154.168 -85.701,153.745 -86.124,153.745 -86.124,152.898 ; -86.124,156.285 -86.124,156.708 -85.701,157.131 -86.124,157.555 -86.124,157.978 -85.701,157.978 -85.277,157.555 -84.854,157.978 -84.431,157.978 -84.431,157.555 -84.854,157.131 -84.431,156.708 -84.431,156.285 -84.854,156.285 -85.277,156.708 -85.701,156.285 -86.124,156.285 ; -86.124,161.788 -84.431,161.788 -85.277,160.095 -86.124,161.788 ; -86.124,164.751 -85.277,163.905 -84.431,164.751 -85.277,165.598 -86.124,164.751 ; -85.785,137.573 -85.277,137.827 -84.769,137.573 -85.023,138.081 -84.769,138.589 -85.277,138.335 -85.785,138.589 -85.531,138.081 -85.785,137.573 ; -85.785,145.447 -85.531,145.447 -85.531,145.193 -85.023,145.193 -85.023,145.447 -84.769,145.447 -84.769,145.955 -85.023,145.955 -85.023,146.209 -85.531,146.209 -85.531,145.955 -85.785,145.955 -85.785,145.447 ; -85.785,149.003 -85.785,149.257 -85.531,149.511 -85.785,149.765 -85.785,150.019 -85.531,150.019 -85.277,149.765 -85.023,150.019 -84.769,150.019 -84.769,149.765 -85.023,149.511 -84.769,149.257 -84.769,149.003 -85.023,149.003 -85.277,149.257 -85.531,149.003 -85.785,149.003
  lines w0.381: -87.643,124.662 117.075,124.662 ; -87.643,166.572 117.075,166.572 ; -73.65,120.852 -73.65,170.382 ; -58.668,120.852 -58.668,170.382 ; -29.213,120.852 -29.213,170.382 ; -16.364,120.852 -16.364,170.382 ; 2.275,120.852 2.275,170.382 ; 40.363,120.852 40.363,170.382 ; 55.346,120.852 55.346,170.382 ; 74.289,120.852 74.289,170.382 ; -87.643,120.852 117.075,120.852 117.075,170.382 -87.643,170.382 -87.643,120.852
  text "Symbol" at -85.357,167.715 h1.83
  text "Count" at -72.507,167.715 h1.83
  text "Hole Size" at -57.525,167.715 h1.83
  text "Plated" at -28.07,167.715 h1.83
  text "Hole Type" at -15.221,167.715 h1.83
  text "Drill Layer Pair" at 3.418,167.715 h1.83
  text "Via/Pad" at 41.506,167.715 h1.83
  text "Pad Shape" at 56.489,167.715 h1.83
  text "Template" at 75.432,167.715 h1.83
  text "1" at -72.507,163.905 h1.52
  text "12.00mil (0.305mm)" at -57.525,163.905 h1.52
  text "PTH" at -28.07,163.905 h1.52
  text "Round" at -15.221,163.905 h1.52
  text "Top Layer - Bottom Layer" at 3.418,163.905 h1.52
  text "Via" at 41.506,163.905 h1.52
  text "Rounded" at 56.489,163.905 h1.52
  text "v61h30m0mx0" at 75.432,163.905 h1.52
  text "2" at -72.507,160.095 h1.52
  text "21.65mil (0.550mm)" at -57.525,160.095 h1.52
  text "PTH" at -28.07,160.095 h1.52
  text "Slot" at -15.221,160.095 h1.52
  text "Top Layer - Bottom Layer" at 3.418,160.095 h1.52
  text "Pad" at 41.506,160.095 h1.52
  text "Rounded" at 56.489,160.095 h1.52
  text "r125_95h55_85r100m133_103" at 75.432,160.095 h1.52
  text "2" at -72.507,156.285 h1.52
  text "21.65mil (0.550mm)" at -57.525,156.285 h1.52
  text "PTH" at -28.07,156.285 h1.52
  text "Slot" at -15.221,156.285 h1.52
  text "Top Layer - Bottom Layer" at 3.418,156.285 h1.52
  text "Pad" at 41.506,156.285 h1.52
  text "Rounded" at 56.489,156.285 h1.52
  text "r155_100h55_115r100m163_108" at 75.432,156.285 h1.52
  text "2" at -72.507,152.475 h1.52
  text "27.56mil (0.700mm)" at -57.525,152.475 h1.52
  text "PTH" at -28.07,152.475 h1.52
  text "Round" at -15.221,152.475 h1.52
  text "Top Layer - Bottom Layer" at 3.418,152.475 h1.52
  text "Pad" at 41.506,152.475 h1.52
  text "(Mixed)" at 56.489,152.475 h1.52
  text "(Mixed)" at 75.432,152.475 h1.52
  text "2" at -72.507,148.665 h1.52
  text "35.43mil (0.900mm)" at -57.525,148.665 h1.52
  text "NPTH" at -28.07,148.665 h1.52
  text "Round" at -15.221,148.665 h1.52
  text "Top Layer - Bottom Layer" at 3.418,148.665 h1.52
  text "Pad" at 41.506,148.665 h1.52
  text "Rounded" at 56.489,148.665 h1.52
  text "c0hn90m-1p-1" at 75.432,148.665 h1.52
  text "2" at -72.507,144.855 h1.52
  text "86.61mil (2.200mm)" at -57.525,144.855 h1.52
  text "NPTH" at -28.07,144.855 h1.52
  text "Round" at -15.221,144.855 h1.52
  text "Top Layer - Bottom Layer" at 3.418,144.855 h1.52
  text "Pad" at 41.506,144.855 h1.52
  text "Rounded" at 56.489,144.855 h1.52
  text "c0hn220" at 75.432,144.855 h1.52
  text "3" at -72.507,141.045 h1.52
  text "39.37mil (1.000mm)" at -57.525,141.045 h1.52
  text "NPTH" at -28.07,141.045 h1.52
  text "Round" at -15.221,141.045 h1.52
  text "Top Layer - Bottom Layer" at 3.418,141.045 h1.52
  text "Pad" at 41.506,141.045 h1.52
  text "Rounded" at 56.489,141.045 h1.52
  text "c100hn100" at 75.432,141.045 h1.52
  text "3" at -72.507,137.235 h1.52
  text "236.22mil (6.000mm)" at -57.525,137.235 h1.52
  text "PTH" at -28.07,137.235 h1.52
  text "Round" at -15.221,137.235 h1.52
  text "Top Layer - Bottom Layer" at 3.418,137.235 h1.52
  text "Pad" at 41.506,137.235 h1.52
  text "Rounded" at 56.489,137.235 h1.52
  text "c800h600" at 75.432,137.235 h1.52
  text "6" at -72.507,133.425 h1.52
  text "39.37mil (1.000mm)" at -57.525,133.425 h1.52
  text "PTH" at -28.07,133.425 h1.52
  text "Round" at -15.221,133.425 h1.52
  text "Top Layer - Bottom Layer" at 3.418,133.425 h1.52
  text "Pad" at 41.506,133.425 h1.52
  text "(Mixed)" at 56.489,133.425 h1.52
  text "(Mixed)" at 75.432,133.425 h1.52
  text "38" at -72.507,129.615 h1.52
  text "9.84mil (0.250mm)" at -57.525,129.615 h1.52
  text "PTH" at -28.07,129.615 h1.52
  text "Round" at -15.221,129.615 h1.52
  text "Top Layer - Bottom Layer" at 3.418,129.615 h1.52
  text "Via" at 41.506,129.615 h1.52
  text "Rounded" at 56.489,129.615 h1.52
  text "(Mixed)" at 75.432,129.615 h1.52
  text "132" at -72.507,125.805 h1.52
  text "11.81mil (0.300mm)" at -57.525,125.805 h1.52
  text "PTH" at -28.07,125.805 h1.52
  text "Round" at -15.221,125.805 h1.52
  text "Top Layer - Bottom Layer" at 3.418,125.805 h1.52
  text "Via" at 41.506,125.805 h1.52
  text "Rounded" at 56.489,125.805 h1.52
  text "v61h30m0mx0(1)" at 75.432,125.805 h1.52
  text "193 Total" at -72.507,121.995 h1.52
  text "Slot definitions :" at -85.357,118.312 h1.52
  text "Routed Path Length" at -59.126,118.312 h1.52
  text "= Calculated from tool start centre position to tool end centre position." at -31.119,118.312 h1.52
  text "Hole Length" at -59.126,115.773 h1.52
  text "= Routed Path Length + Tool Size = Slot length as defined in the PCB layout" at -41.529,115.773 h1.52
  text "'.Layer_Name'" at 388.409,-71.929 h2.54

## Dimensions
0,25.013 to 0.002,-30.281 on Dimensions
-25.011,0 to 25.003,0 on Dimensions
0.002,-24.281 to 0.002,-35.899 on Dimensions
18.599,15.609 to 36.805,20.879 on Dimensions

## Text inside footprints (layer, text, board x,y; h text height)
D3: Top Overlay "K" at 4.166,16.637 h0.76
D4: Top Overlay "K" at -5.385,19.253 h0.76
J3: Mechanical 15 "PCB Edge" at -18.949,-14.416 h0.76 r309